# Altium PCB arm-debugger.PcbDoc
Units mm, origin at the board's own origin, x right, y up, seen from the top; angles counter-clockwise.
Board outline 50 x 30 mm, 4 copper layers (Top Layer, GND, 3V3, Bottom Layer), stack 0.603 mm thick; 58 components, 36 nets, 217 pads, 78 vias.
Unrouted connection lines stored in the file: 13.
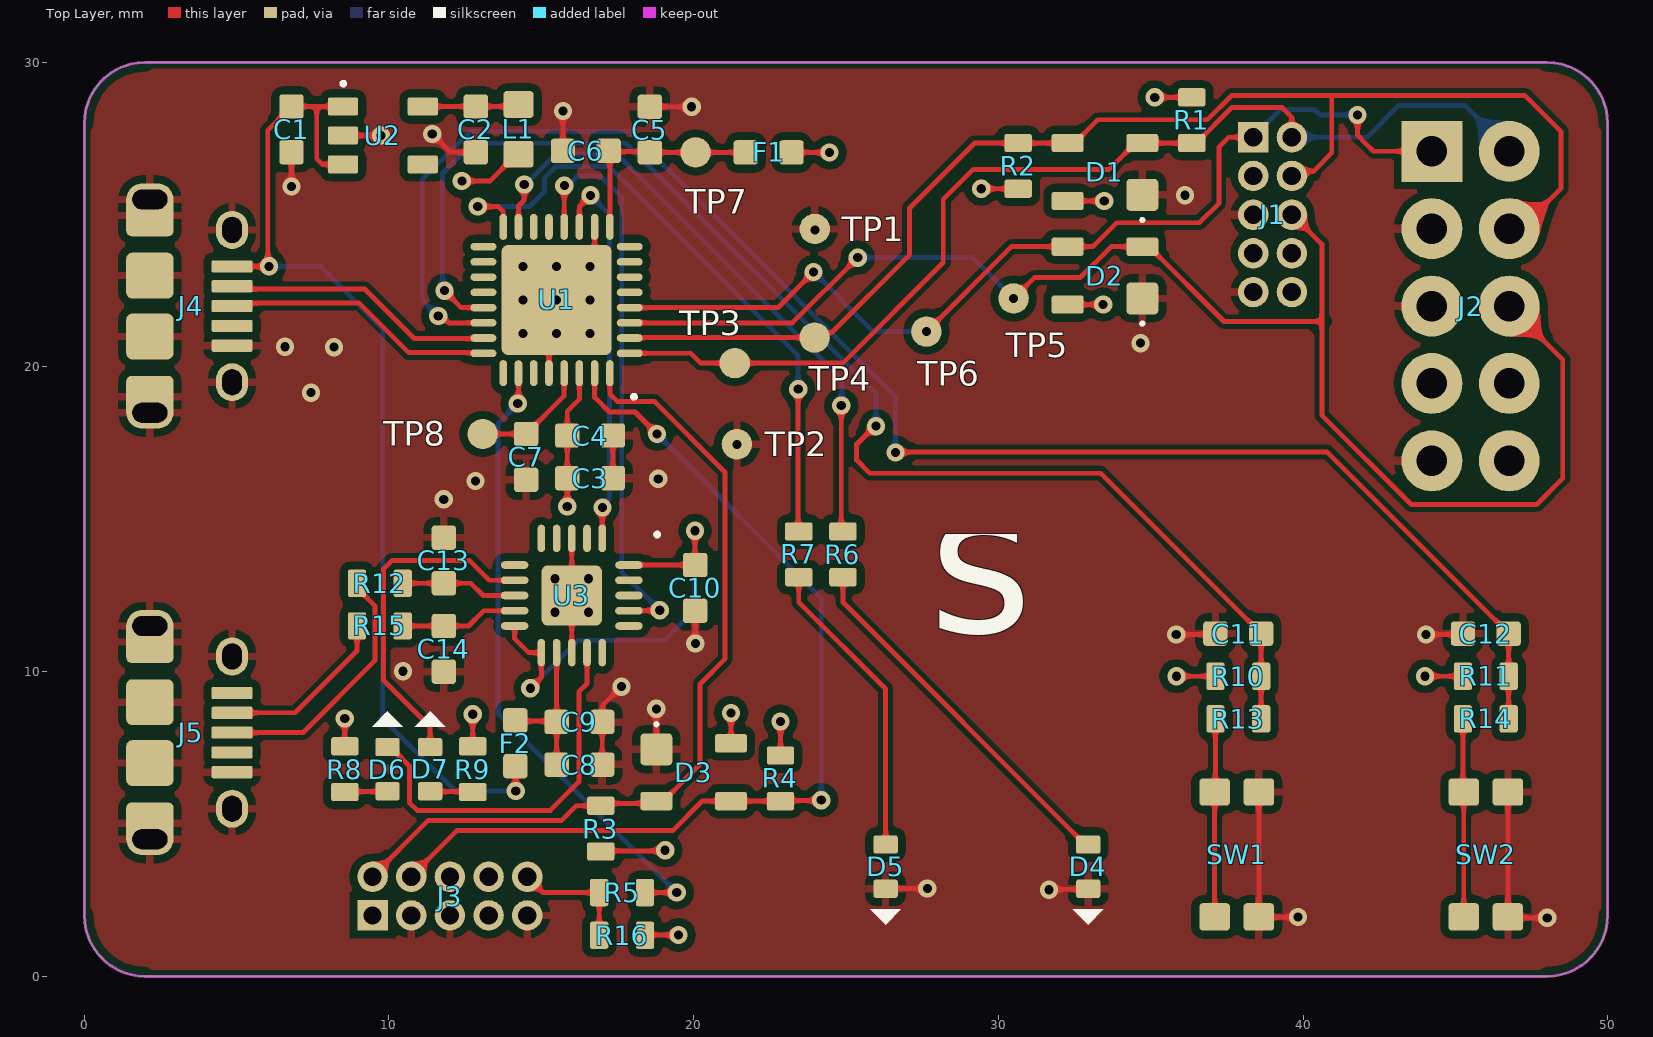
[diagram p0: Top Layer view]
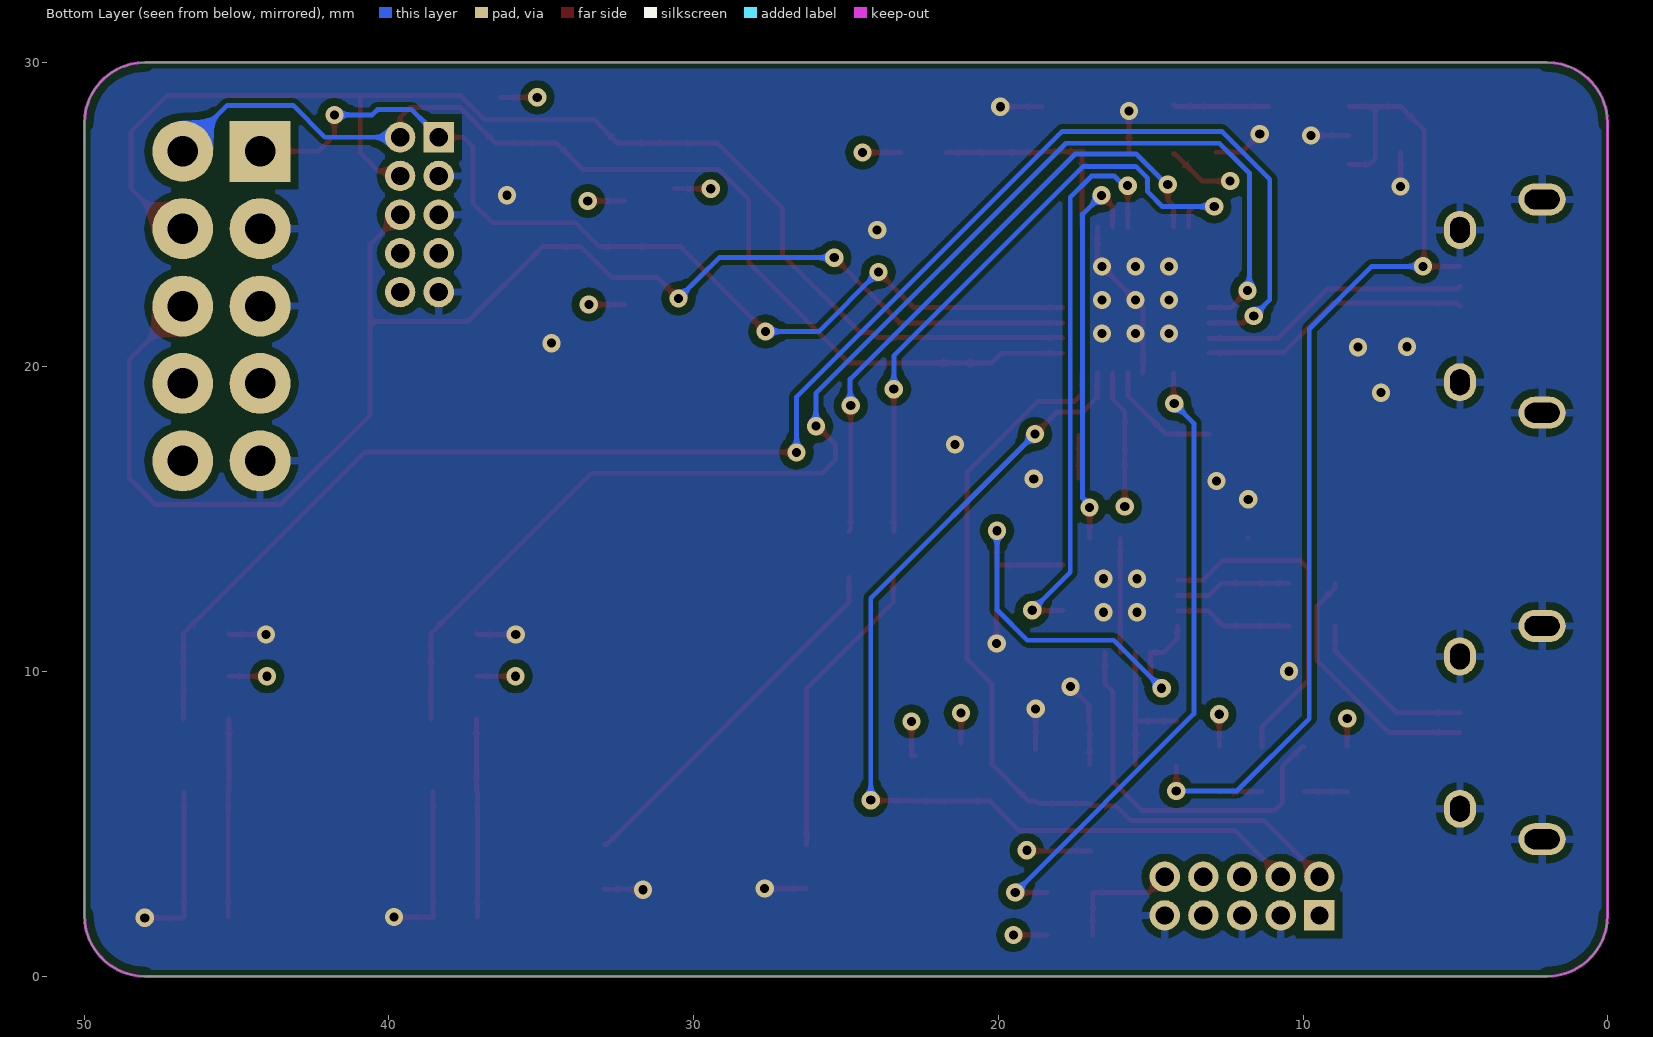
[diagram p1: Bottom Layer view, seen from below]
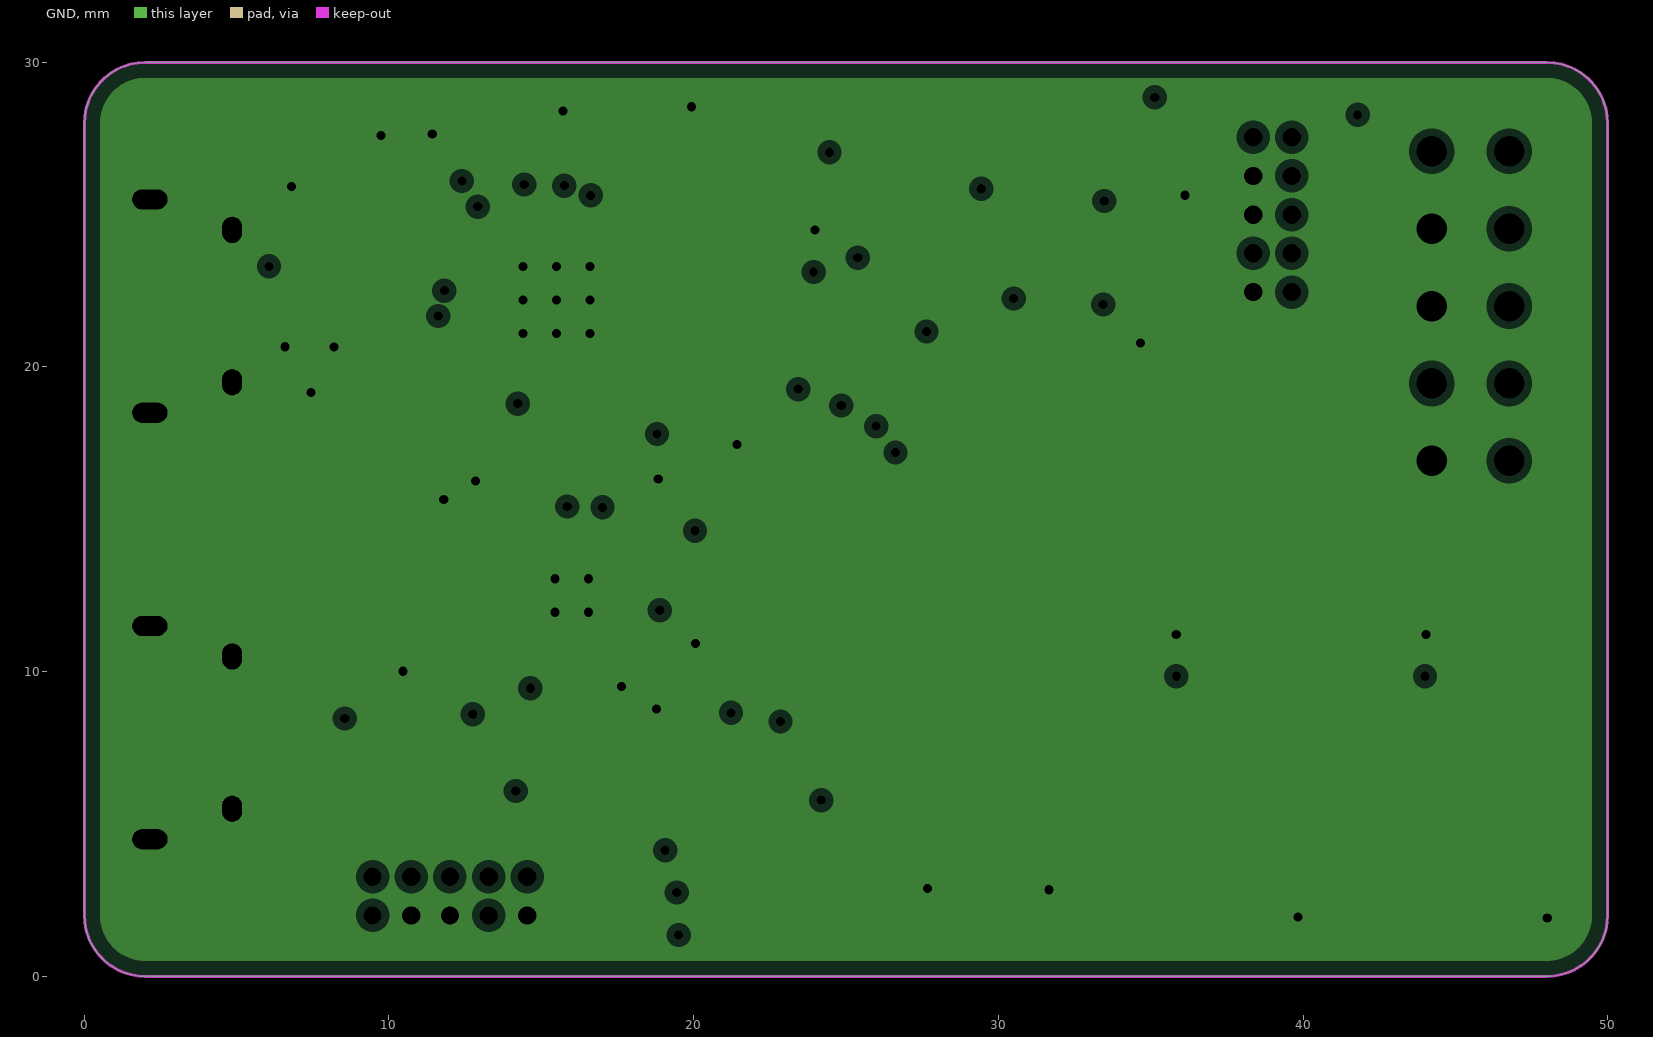
[diagram p2: GND, clearances drawn from the general rule]
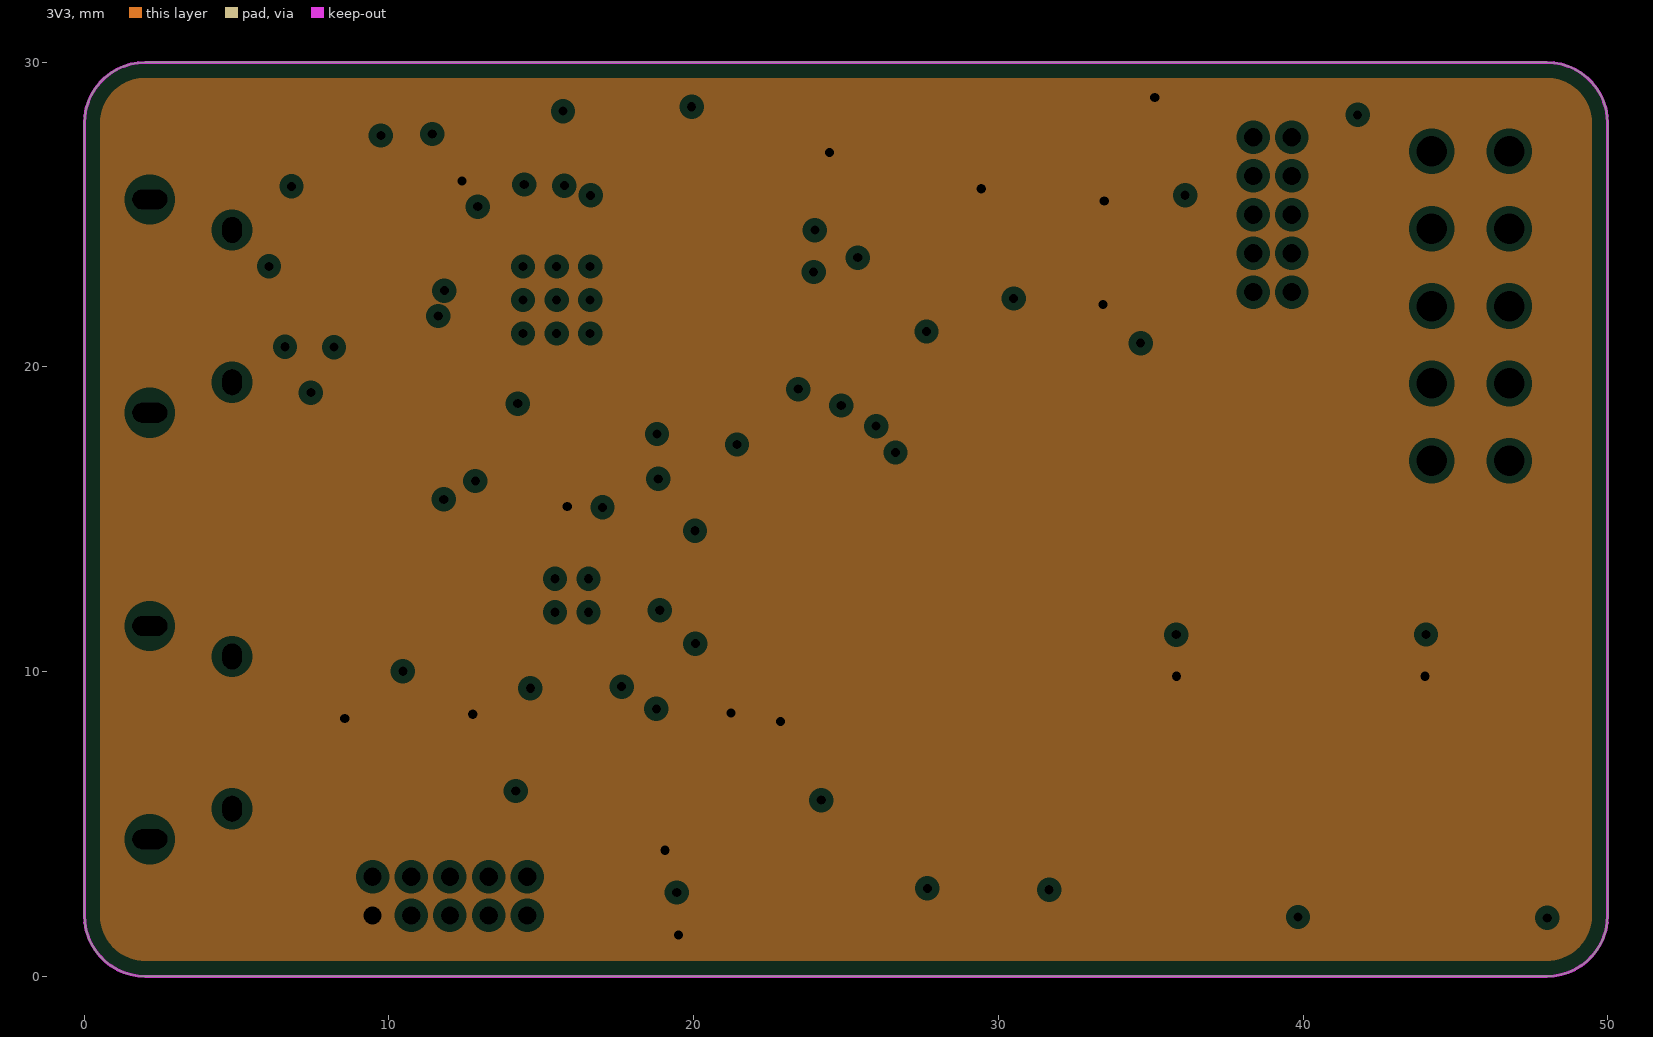
[diagram p3: 3V3, clearances drawn from the general rule]
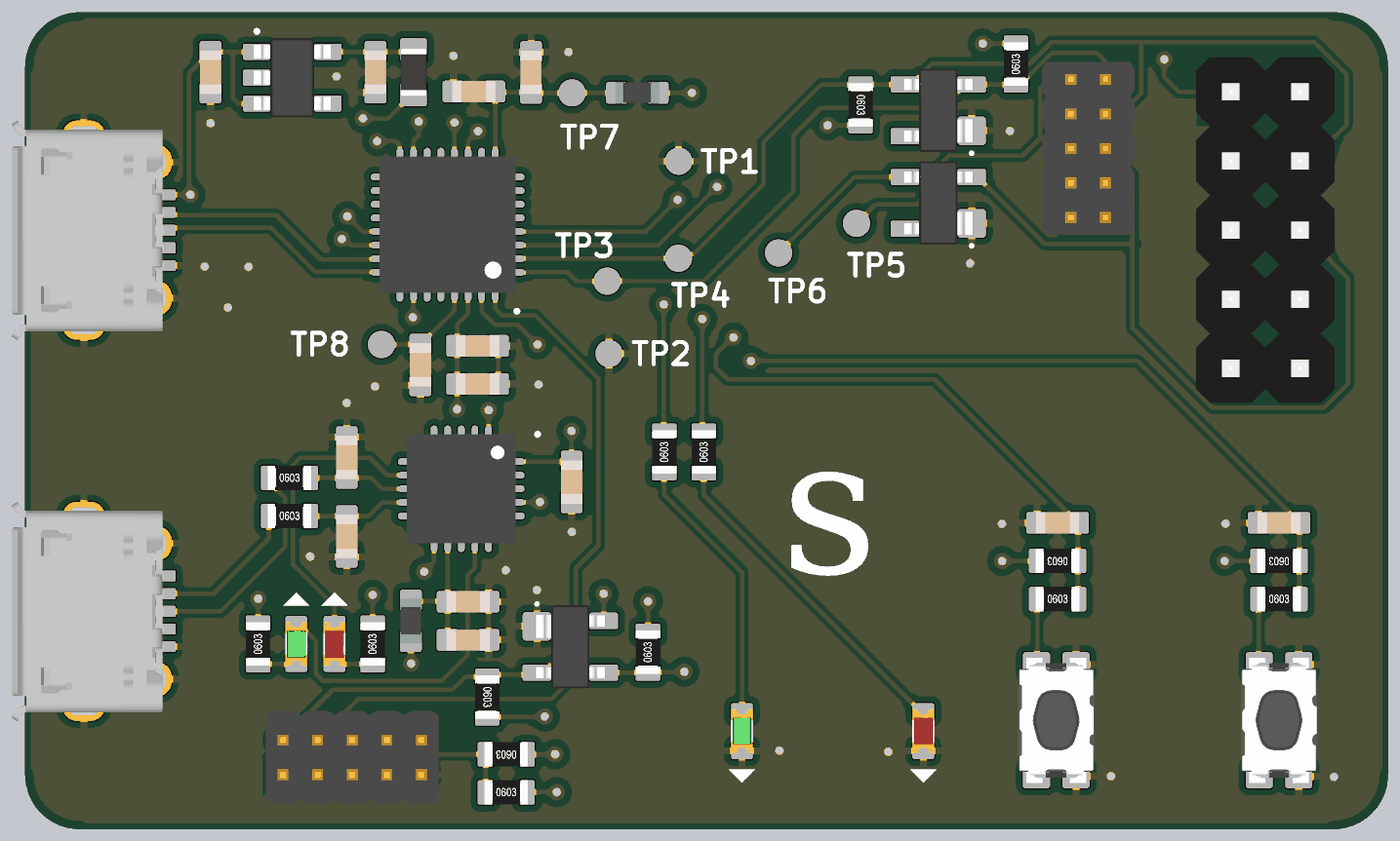
[diagram p4: 3D render of the assembled board from above, using the file's embedded part models]

## Layer stack, top to bottom
Top Solder: solder mask 0.0102, Solder Resist, Dk 3.5
Top Layer: signal copper 0.0356
Dielectric 2: prepreg 0.0711, PP-006, Dk 4.1
GND: plane copper 0.035, net GND
Dielectric 1: dielectric 0.32, FR-4, Dk 4.8
3V3: plane copper 0.035, net 3V3
Dielectric 3: prepreg 0.0711, PP-006, Dk 4.1
Bottom Layer: signal copper 0.0356
Bottom Solder: solder mask 0.0102, Solder Resist, Dk 3.5

## Board outline
0,2 0,28 cw(c2,28) 2,30 48,30 cw(c48,28) 50,28 50,2 cw(c48,2) 48,0 2,0 cw(c2,2)

## Design rules (kind name [scope] priority, off if disabled: settings)
Clearance [All] p1: gap=0.254 ignorepadtopadclearanceinfootprint=TRUE except(0: Arc-Hole Track-Hole SMDPad-Hole THPad-Hole Via-Hole Fill-Hole Poly-Hole Region-Hole Text-Hole; 0.127: Arc-Arc Arc-Track Track-Track SMDPad-SMDPad; 0.154: Track-Poly; 0.2: Arc-SMDPad Track-SMDPad; 0.33: Arc-THPad Track-THPad)
DiffPairsRouting [All] p1: maxlimit=0.5 minlimit=0.16 mostfreqgap=0.3 toplayer_minwidth=0.16 toplayer_maxwidth=5 toplayer_prefwidth=0.3 bottomlayer_minwidth=0.16 bottomlayer_maxwidth=5 bottomlayer_prefwidth=0.3 maxuncoupledlength=12.7
PlaneClearance [All] p1: clearance=0.25
PlaneConnect [All] p1: planeconnectstyle=Relief reliefexpansion=0.25 reliefentries=4 reliefconductorwidth=0.16 reliefairgap=0.2
PolygonConnect PolygonConnectVia [IsVia] p1: connectstyle=Direct reliefconductorwidth=0.254 reliefentries=4 polygonreliefangle="90 Angle" airgapwidth=0.254
PolygonConnect [All] p2: connectstyle=Relief reliefconductorwidth=0.254 reliefentries=4 polygonreliefangle="90 Angle" airgapwidth=0.254
RoutingVias [All] p1: holewidth=0.3 width=0.6 viastyle="Through Hole" minholewidth=0.2 minwidth=0.4 maxholewidth=6.3 maxwidth=10
SolderMaskExpansion [All] p1: expansion=0.05 istentingtop=FALSE
Width [All] p1: maxlimit=10 minlimit=0.127 preferedwidth=0.16
27 further rules are at their usual default settings.

## Classes and differential pairs
differential pair USB: +USB_P -USB_N
differential pair FTDI_USB: +FTDI_USB_P -FTDI_USB_N

## Components (designator, comment, footprint, x,y, rotation, side; value= is the part's Value field where it differs from the comment)
C1 "passive_5" "CAPACITOR 0603" 6.8,27.8 r90 top value=100nF
C2 "passive_5" "CAPACITOR 0603" 12.85,27.8 r90 top value=1uF
C3 "passive_5" "CAPACITOR 0603" 16.6,16.35 r180 top value=10uF
C4 "passive_5" "CAPACITOR 0603" 16.6,17.75 r180 top value=100nF
C5 "passive_5" "CAPACITOR 0603" 18.561,27.793 r270 top value=10uF
C6 "passive_5" "CAPACITOR 0603" 16.461,27.093 r0 top value=100nF
C7 "passive_5" "CAPACITOR 0603" 14.5,17.05 r90 top value=1uF
C8 "passive_5" "CAPACITOR 0603" 16.25,6.95 r180 top value=4.7uF
C9 "passive_5" "CAPACITOR 0603" 16.25,8.35 r180 top value=100nF
C10 "passive_5" "CAPACITOR 0603" 20.05,12.75 r90 top value=100nF
C11 "passive_5" "CAPACITOR 0603" 37.876,11.25 r0 top value=10nF
C12 "passive_5" "CAPACITOR 0603" 46,11.25 r0 top value=10nF
C13 "passive_5" "CAPACITOR 0603" 11.8,13.65 r270 top value=100nF
C14 "passive_5" "CAPACITOR 0603" 11.8,10.75 r90 top value=100nF
D1 "diode_3" CM1293A-02SR 33.5,26.4 r180 top
D2 "diode_3" CM1293A-02SR 33.5,23 r180 top
D3 "diode_3" CM1293A-02SR 20,6.7 r0 top
D4 "LED Red" "LED 0603 red" 32.95,3.6 r270 top
D5 "LED Green" "LED 0603 green" 26.3,3.6 r270 top
D6 "LED Green" "LED 0603 green" 9.95,6.8 r90 top
D7 "LED Red" "LED 0603 red" 11.35,6.8 r90 top
F1 "passive_8" "FERRIT BEAD 0603" 22.461,27.043 r180 top value="480Ω @ 100MHz"
F2 "passive_8" "FERRIT BEAD 0603" 14.15,7.65 r90 top value="480Ω @ 100MHz"
J1 "Header 1.27mm" "header male 2x5, pitch 1.27mm" 39,25 r0 top
J2 "Header 2.54mm" "header male 2x5, pitch 2.54mm" 45.5,22 r0 top
J3 "Header 1.27mm" "header male 2x5, pitch 1.27mm" 12,2.635 r90 top
J4 "USB micro B" "USB mico B female" 3.5,22 r270 top
J5 "USB micro B" "USB mico B female" 3.5,8 r270 top
L1 "passive_9" "INDUCTOR 0603" 14.25,27.8 r270 top value=10uH
R1 "passive_2" "RESISTOR 0603" 36.35,28.1 r90 top value=10kΩ
R2 "passive_2" "RESISTOR 0603" 30.65,26.6 r270 top value=10kΩ
R3 "passive_2" "RESISTOR 0603" 16.95,4.85 r270 top value=10kΩ
R4 "passive_2" "RESISTOR 0603" 22.85,6.5 r90 top value=10kΩ
R5 "passive_2" "RESISTOR 0603" 17.65,2.75 r180 top value=39Ω
R6 "passive_2" "RESISTOR 0603" 24.9,13.85 r90 top value=330Ω
R7 "passive_2" "RESISTOR 0603" 23.45,13.85 r90 top value=330Ω
R8 "passive_2" "RESISTOR 0603" 8.55,6.8 r90 top value=330Ω
R9 "passive_2" "RESISTOR 0603" 12.75,6.8 r90 top value=330Ω
R10 "passive_2" "RESISTOR 0603" 37.876,9.85 r180 top value=100kΩ
R11 "passive_2" "RESISTOR 0603" 46,9.85 r180 top value=100kΩ
R12 "passive_2" "RESISTOR 0603" 9.7,12.9 r0 top value=39Ω
R13 "passive_2" "RESISTOR 0603" 37.876,8.45 r0 top value=10kΩ
R14 "passive_2" "RESISTOR 0603" 46,8.45 r0 top value=10kΩ
R15 "passive_2" "RESISTOR 0603" 9.7,11.5 r0 top value=39Ω
R16 "passive_2" "resistor 0603" 17.65,1.35 r0 top value=10kΩ
SW1 "connector_35" "KMR621NG LFS" 37.826,4 r90 top
SW2 "connector_35" "KMR621NG LFS" 46,4 r90 top
TP1 "misc_2" "testpoint round, diameter 1mm" 23.978,24.532 r0 top
TP2 "misc_2" "testpoint round, diameter 1mm" 21.42,17.467 r0 top
TP3 "misc_2" "testpoint round, diameter 1mm" 21.351,20.127 r0 top
TP4 "misc_2" "testpoint round, diameter 1mm" 23.967,20.967 r0 top
TP5 "misc_2" "testpoint round, diameter 1mm" 30.5,22.25 r0 top
TP6 "misc_2" "testpoint round, diameter 1mm" 27.641,21.163 r0 top
TP7 "misc_2" "testpoint round, diameter 1mm" 20.061,27.043 r0 top
TP8 "misc_2" "testpoint round, diameter 1mm" 13.073,17.801 r0 top
U1 "SAMD21" ATSAMD21E17D-MUT 15.5,22.2 r180 top
U2 "regulator_1" TCR2EF33,LM(CT 9.8,27.6 r0 top
U3 "FTDI" FT231XQ-R 16,12.5 r270 top

## Footprints (in the part's own frame and the unit in brackets; to place one, negate y for a bottom-side part, rotate by r counter-clockwise, add the part's x,y. Pads: shape width x height; smd on the part's side, far side on the other; paste and mask are expansions set on the pad)
ATSAMD21E17D-MUT [mm] "QFN, 32-Leads, Body 5.00x5.00mm, Pitch 0.50mm, Thermal Pad 3.60x3.60mm, IPC Medium Density"
  oval 0.85x0.25 smd: 1(-2.4,1.75) 2(-2.4,1.25) 3(-2.4,0.75) 4(-2.4,0.25) 5(-2.4,-0.25) 6(-2.4,-0.75) 7(-2.4,-1.25) 8(-2.4,-1.75) 17(2.4,-1.75) 18(2.4,-1.25) 19(2.4,-0.75) 20(2.4,-0.25) 21(2.4,0.25) 22(2.4,0.75) 23(2.4,1.25) 24(2.4,1.75)
  oval 0.25x0.85 smd: 9(-1.75,-2.4) 10(-1.25,-2.4) 11(-0.75,-2.4) 12(-0.25,-2.4) 13(0.25,-2.4) 14(0.75,-2.4) 15(1.25,-2.4) 16(1.75,-2.4) 25(1.75,2.4) 26(1.25,2.4) 27(0.75,2.4) 28(0.25,2.4) 29(-0.25,2.4) 30(-0.75,2.4) 31(-1.25,2.4) 32(-1.75,2.4)
  rrect10% 3.6x3.6 smd: 33(0,0)
  silkscreen extent -2.59,3.13 -2.49,3.22, body extent -2.5,-2.5 2.5,2.5, height 1
"CAPACITOR 0603" [mm]
  rrect25% 0.8x0.8 smd: 1(-0.75,0) 2(0.75,0)
  body extent -0.8,-0.4 0.8,0.4, height 0.8
CM1293A-02SR [mm] "SOT143, 4-Leads, Body 2.93x2.64mm, Pitch 1.90mm, IPC Medium Density"
  rrect25% 1.05x1.05 smd: 1(-1.225,0.75)
  rrect25% 1.05x0.6 smd: 2(-1.225,-0.95) 3(1.225,-0.95) 4(1.225,0.95)
  silkscreen extent -1.27,1.53 -1.18,1.62, body extent -1.32,-1.52 1.32,1.52, height 1.12
"FERRIT BEAD 0603" [mm]
  rrect25% 0.8x0.8 smd: 1(-0.75,0) 2(0.75,0)
  body extent -0.79,-0.4 0.81,0.4, height 0.8
FT231XQ-R [mm] "QFN, 20-Leads, Body 4.00x4.00mm, Pitch 0.50mm, Thermal Pad 1.98x1.98mm, IPC Medium Density"
  oval 0.9x0.25 smd: 1(-1.875,1) 2(-1.875,0.5) 3(-1.875,0) 4(-1.875,-0.5) 5(-1.875,-1) 11(1.875,-1) 12(1.875,-0.5) 13(1.875,0) 14(1.875,0.5) 15(1.875,1)
  oval 0.25x0.9 smd: 6(-1,-1.875) 7(-0.5,-1.875) 8(0,-1.875) 9(0.5,-1.875) 10(1,-1.875) 16(1,1.875) 17(0.5,1.875) 18(0,1.875) 19(-0.5,1.875) 20(-1,1.875)
  rrect20% 1.98x1.98 smd: 21(0,0)
  silkscreen extent -2.05,2.75 -1.95,2.85, body extent -2,-2 2,2, height 0.8
"header male 2x5, pitch 1.27mm" [mm]
  rect 1x1 hole 0.6: 1(-0.635,2.54)
  round 1 hole 0.6: 2(0.635,2.54) 3(-0.635,1.27) 4(0.635,1.27) 5(-0.635,0) 6(0.635,0) 7(-0.635,-1.27) 8(0.635,-1.27) 9(-0.635,-2.54) 10(0.635,-2.54)
  body extent -1.7,-3.17 1.7,3.17, height 5.35
"header male 2x5, pitch 2.54mm" [mm]
  rect 2x2 hole 1: 1(-1.27,5.08)
  round 2 hole 1: 2(1.27,5.08) 3(-1.27,2.54) 4(1.27,2.54) 5(-1.27,0) 6(1.27,0) 7(-1.27,-2.54) 8(1.27,-2.54) 9(-1.27,-5.08) 10(1.27,-5.08)
  body extent -2.54,-6.35 2.54,6.35, height 8.89
"INDUCTOR 0603" [mm]
  rrect25% 0.88x0.99 smd: 1(-0.815,0) 2(0.815,0)
  body extent -0.87,-0.48 0.87,0.48, height 0.91
"KMR621NG LFS" [mm]
  rrect25% 0.9x1 smd: 1(-2.05,0.725) 1(2.05,0.725) 2(-2.05,-0.725) 2(2.05,-0.725)
  body extent -2.3,-1.4 2.3,1.4, height 1.9
"LED 0603 green" [mm]
  rrect25% 0.6x0.8 smd: 1(-0.725,0) 2(0.725,0)
  silkscreen extent 1.4,-0.5 1.9,0.5, body extent -0.8,-0.4 0.8,0.4, height 0.6
"LED 0603 red" [mm]
  rrect25% 0.6x0.8 smd: 1(-0.725,0) 2(0.725,0)
  silkscreen extent 1.4,-0.5 1.9,0.5, body extent -0.8,-0.4 0.8,0.4, height 0.6
"RESISTOR 0603" [mm]
  rrect25% 0.6x0.9 smd: 1(-0.75,0) 2(0.75,0)
  body extent -0.8,-0.45 0.8,0.45, height 0.5
"resistor 0603" [mm]
  rrect25% 0.6x0.9 smd: 1(-0.75,0) 2(0.75,0)
  body extent -0.8,-0.45 0.8,0.45, height 0.5
TCR2EF33,LM(CT [mm] "SOT23, 5-Leads, Body 2.90x2.80mm, Pitch 0.95mm, IPC Medium Density"
  rrect25% 1x0.6 smd: 1(-1.31,0.95) 2(-1.31,0) 3(-1.31,-0.95) 4(1.31,-0.95) 5(1.31,0.95)
  silkscreen extent -1.35,1.65 -1.25,1.75, body extent -1.41,-1.46 1.41,1.46, height 1.12
"testpoint round, diameter 1mm" [mm]
  round 1 smd: 1(0,0)
"USB mico B female" [mm]
  rrect25% 0.4x1.35 smd: 1(-1.3,1.35) 2(-0.65,1.35) 3(0,1.35) 4(0.65,1.35) 5(1.3,1.35)
  rrect100% 1.05x1.55 hole 0.65 slot 1.15 at 90 deg: 6(-3.5,-1.35) 6(3.5,-1.35)
  rrect25% 1.37x1.55 smd: 6(-2.975,-1.35) 6(2.975,-1.35)
  rrect100% 1.25x1.05 hole 0.65 slot 0.85 at 0 deg: 6(-2.5,1.35) 6(2.5,1.35)
  rrect25% 1.5x1.55 smd: 6(-1,-1.35) 6(1,-1.35)
  body extent -4.01,-3.99 4.03,1.59, height 2.76

## Part data
C1 C2 C3 C4 C5 C6 C7 C8 C9 C10 C11 C12 C13 C14: "Capacitor 0603"
D1 D2 D3: "TVS, 2 channels, standoff 3.3V,  diode array with avalanche diode", Clamping voltage=9.9V, Manufacturer 1="ON Semiconductor", Manufacturer Part Number 1=CM1293A-02SR, Peak current=1A, Supplier Part Number 1=CM1293A-02SROSCT-ND, Link=https://www.digikey.no/product-detail/en/on-semiconductor/CM1293A-02SR/CM1293A-02SROSCT-ND/3487527, Reverse standoff=3.3V, Supplier 1=Digi-Key
D4 D7: library part diode_0, "LED 0603 red"
D5 D6: library part diode_1, "LED 0603 green"
F1 F2: "Ferrite bead 0603"
J1 J3: library part connector_17, "Header male 2x5, pitch 1.27mm"
J2: library part connector_30, "Header male 2x5, pitch 2.54mm"
J4 J5: library part connector_34, Manufacturer 1="Amphenol ICC (FCI)", Manufacturer Part Number 1=10118194-0001LF, Supplier Part Number 1=609-4618-1-ND, Link=https://www.digikey.no/product-detail/en/amphenol-icc-fci/10118194-0001LF/609-4618-1-ND/2785382, Supplier 1=Digi-Key
L1: "Inductor 0603"
R1 R2 R3 R4 R5 R6 R7 R8 R9 R10 R11 R12 R13 R14 R15 R16: "Resistor 0603"
SW1 SW2: "Tactile switch SMD, tiny", Manufacturer 1=C&K, Manufacturer Part Number 1="KMR621NG LFS", Supplier Part Number 1=CKN10684CT-ND, Link=https://www.digikey.no/product-detail/en/c-k/KMR621NG-LFS/CKN10684CT-ND/6035356, Supplier 1=Digi-Key
TP1 TP2 TP3 TP4 TP5 TP6 TP7 TP8: "Test-point round, diameter 1.0mm"
U1: library part cpu_0, "SAMD21, 48 MHz, 128KB flash, 16KB RAM, 32 pins, USB device", Manufacturer 1="Microchip Technology", Manufacturer Part Number 1=ATSAMD21E17D-MUT, Supplier Part Number 1=ATSAMD21E17D-MUTTR-ND, Link=https://www.digikey.no/products/no?keywords=ATSAMD21E17D-MUTTR-ND, Supplier 1=Digi-Key
U2: "LDO fixed, 3.3V output, 0.2V dropout, 200mA", Current (max)=200mA, Manufacturer 1="Toshiba Semiconductor and Storage", Manufacturer Part Number 1=TCR2EF33,LM(CT, Output voltage=3.3V, Supplier Part Number 1=TCR2EF33LM(CTCT-ND, Dropout (max)=0.2V, Link=https://www.digikey.no/product-detail/en/toshiba-semiconductor-and-storage/TCR2EF33-LM-CT/TCR2EF33LM-CTCT-ND/4503328, Supplier 1=Digi-Key
U3: library part ic_1, "USB to UART converter, FTDI, single", Manufacturer 1="FTDI, Future Technology Devices International Ltd", Manufacturer Part Number 1=FT231XQ-R, Supplier Part Number 1=768-1128-1-ND, Supplier 1=Digi-Key

## Via types
v1: diameter 0.6, hole 0.3, Top Layer to Bottom Layer, tented both sides, 78 vias

## Nets (pads, with @x,y where several pads share a name; then routed paths per layer and width w, separated by ;. In a path a pad name is that pad's centre, name@x,y a point inside that pad or via, vN(x,y) a via of type N, cw(c..) or ccw(c..) an arc to the next point about the centre after c; other vN are vias at no path point)
3V3: C3.2 C4.2 D1.4 D2.4 D3.4 F1.1 J3.1 L1.2 R1.2 R2.2 R3.2 R4.2 R8.2 R9.2 R10.2 R11.2 R16.2 U1.30 | length 22.8
  Top Layer w0.16: R8.2 v1(8.55,8.464) ; v1(12.391,26.103) 13.313,26.103 14.195,26.985 L1.2 ; R9.2 v1(12.75,8.603) ; v1(15.85,15.421) C3.2 C4.2 15.85,18.547 16.25,18.947 U1.30 ; R3.2 16.969,4.119 19.045,4.119 v1(19.064,4.138) ; R16.2 18.409,1.359 v1(19.504,1.359) ; D3.4 v1(21.225,8.646) ; R4.2@22.7,7.25 R4.2 v1(22.85,8.365) ; F1.1 v1(24.46,27.043) ; v1(29.44,25.85) R2.2 ; D2.4 v1(33.44,22.05) ; D1.4 v1(33.475,25.45) ; v1(35.135,28.85) R1.2 ; v1(35.846,9.85) R10.2 ; v1(44.004,9.85) R11.2
5V: C1.2 F2.1 J4.1 U2.1 U2.3 | length 34.6
  Top Layer w0.16: J4.1 5.927,23.3 5.93,23.303 v1(6.063,23.303) ; v1@6.021,23.394 6.021,27.771 C1.2 7.627,28.55 ; U2.3 7.815,26.65 7.627,26.839 7.627,28.55 ; U2.1 7.627,28.55 ; F2.1 14.159,6.891 v1(14.159,6.083)
  Bottom Layer w0.16: v1(6.063,23.303) 7.739,23.303 9.794,21.249 9.794,8.458 12.169,6.083 v1(14.159,6.083)
EXT_RESET: D2.2 J1.6 J2.6 TP5.1 U1.3 | length 48.7
  Top Layer w0.16: U1.3 23.242,21.45 25.381,23.59 v1(25.387,23.59) ; v1(30.5,22.25) 31.19,22.94 32.698,22.94 33.708,23.95 D2.2 34.95,23.95 37.406,21.494 40.621,21.494 ; J1.6 39.652,25 40.621,24.031 40.621,21.494 ; J2.6 48.527,20.243 48.527,16.346 47.668,15.487 43.553,15.487 40.621,18.419 40.621,21.494
  Bottom Layer w0.16: v1(25.387,23.59) 29.16,23.59 29.763,22.987 v1(30.5,22.25)
EXT_SWCLK: D1.3 J1.4 J2.4 R2.1 TP4.1 U1.2 | length 42.9
  Top Layer w0.16: U1.2 17.917,20.967 TP4.1 24.128,21.128 24.523,21.128 27.086,23.69 27.086,25.218 29.218,27.35 R2.1 D1.3 32.5,27.35 33.263,28.113 36.858,28.113 37.653,28.908 40.942,28.908 ; J1.4 39.796,26.431 40.346,26.431 40.942,27.027 40.942,28.908 ; J2.4 47.147,24.54 48.473,25.866 48.473,27.725 47.29,28.908 41.01,28.908 40.942,28.908
EXT_SWDIO: D1.2 J1.2 J2.2 R1.1 TP3.1 U1.1 | length 35.6
  Top Layer w0.16: U1.1 19.907,20.45 20.23,20.127 24.891,20.127 28.194,23.43 28.194,25.5 29.178,26.484 33.634,26.484 34.5,27.35 D1.2 R1.1 36.5,27.35 37.666,28.516 39.313,28.516 39.635,28.195 J1.2
  Bottom Layer w0.16: J1.2 42.102,27.54 43.149,28.587 45.303,28.587 46.77,27.12 J2.2
EXT_VREF: D2.3 J1.1 J2.1 TP6.1 U1.4 | length 32.7
  Top Layer w0.16: U1.4 22.767,21.95 v1(23.937,23.12) ; v1(27.641,21.163) 30.427,23.95 D2.3 33.1,23.95 33.885,24.735 36.6,24.735 37.245,25.38 37.245,27.225 37.56,27.54 J1.1 ; v1(41.792,28.274) 41.792,27.601 42.059,27.334 42.313,27.08 J2.1
  Bottom Layer w0.16: v1(23.937,23.12) 25.893,21.163 v1(27.641,21.163) ; J1.1 38.785,27.96 38.785,27.977 39.258,28.45 40.378,28.45 40.553,28.274 v1(41.792,28.274)
FTDI_USB_N: C14.2 R15.2 U3.9 | length 3.9
  Top Layer w0.16: R15.2 C14.2 12.608,11.5 13.108,12 U3.9
FTDI_USB_P: C13.2 R12.2 U3.8 | length 3.8
  Top Layer w0.16: R12.2 C13.2 12.689,12.9 13.089,12.5 U3.8
GND: C1.1 C2.1 C3.1 C4.1 C5.1 C6.1 C7.1 C8.1 C9.1 C10.1 C11.1 C12.1 C13.1 C14.1 D1.1 D2.1 D3.1 D4.2 D5.2 J1.3 J1.5 J1.9 J2.3 J2.5 J2.9 J3.3 J3.5 J3.9 J4.5 J4.6 J5.5 J5.6 SW1.2 SW2.2 TP1.1 TP2.1 U1.10 U1.28 U1.33 U2.2 U3.3 U3.13 U3.21 | length 38.6
  Top Layer w0.16: v1(6.8,25.927) C1.1 ; U2.2 v1(9.735,27.6) ; v1(11.422,27.645) 12.017,27.05 C2.1 ; C13.1 C13.1@11.812,14.413 ; U1.28 15.25,21.95 v1(15.5,22.2) v1(16.6,23.3) 16.75,23.45 U1.10 ; C6.1 v1(15.711,28.4) ; U3.13 U3.21 U3.3 ; C8.1 C9.1 17.021,8.371 17.021,8.896 v1(17.634,9.509) ; C3.1 C4.1 ; C5.1 v1(19.933,28.543) ; D3.1 v1(18.775,8.78) ; C10.1 20.055,11.995 v1(20.055,10.921) ; TP2.1 21.424,17.464 v1(21.424,17.455) ; v1(23.978,24.494) TP1.1 ; D5.2 26.305,2.88 27.665,2.88 v1(27.67,2.885) ; v1(31.666,2.844) 31.682,2.859 32.934,2.859 D4.2 ; v1(35.839,11.216) 37.092,11.216 C11.1 ; SW1.2@38.551,6.05 38.551,1.95 38.555,1.945 v1(39.837,1.945) ; v1(44.036,11.22) 45.22,11.22 C12.1 ; SW2.2@46.725,6.05 46.725,1.95 46.755,1.92 v1(48.018,1.92)
  other v1: 10.457,10.014 15.45,11.95 16.55,11.95 15.45,13.05 16.55,13.05 11.796,15.655 12.836,16.259 18.836,16.329 7.437,19.157 6.589,20.666 8.195,20.651 34.669,20.782 14.4,21.1 15.5,21.1 16.6,21.1 14.4,22.2 16.6,22.2 14.4,23.3 15.5,23.3 36.129,25.639
LED_GREEN: R7.2 U1.16 | length 21.1
  Top Layer w0.16: v1(12.914,25.265) 13.589,25.266 13.75,25.105 U1.16 ; v1(23.431,19.274) 23.431,14.619 R7.2
  Bottom Layer w0.16: v1(12.914,25.265) 12.916,25.267 14.614,25.267 15.098,25.751 15.098,26.194 15.489,26.585 17.216,26.585 23.431,20.371 v1(23.431,19.274)
LED_RED: R6.2 U1.15 | length 20.4
  Top Layer w0.16: U1.15 14.25,25.291 14.441,25.483 v1(14.441,25.991) ; v1(24.843,18.736) 24.843,14.657 R6.2
  Bottom Layer w0.16: v1(14.441,25.991) 14.479,25.991 15.477,26.99 17.479,26.99 24.866,19.603 24.866,18.758 v1(24.843,18.736)
NetC2_2: C2.2 L1.1 U2.5 | length 3.2
  Top Layer w0.16: U2.5 C2.2 14.185,28.55 L1.1
NetC5_2: C5.2 C6.2 F1.2 TP7.1 U1.9 | length 7
  Top Layer w0.16: C6.2 C6.2@17.236,27.068 ; U1.9 17.25,27.054 C6.2@17.236,27.068 ; F1.2 TP7.1 C5.2 18.536,27.068 C6.2@17.236,27.068
NetC7_2: C7.2 TP8.1 U1.29 | length 3.9
  Top Layer w0.16: TP8.1 14.499,17.801 C7.2 15.75,19.05 U1.29
NetC8_2: C8.2 C9.2 F2.2 U3.12 | length 5
  Top Layer w0.16: F2.2 14.175,8.375 15.475,8.375 C9.2 ; C8.2 C9.2 ; U3.12 C9.2
NetC10_2: C10.2 U3.10 U3.11 U3.20 | length 15.2
  Top Layer w0.16: U3.10 14.125,11.086 14.586,10.625 U3.11 15,9.815 v1(14.641,9.455) ; U3.20 19.993,13.5 C10.2 20.043,13.507 v1(20.043,14.626)
  Bottom Layer w0.16: v1(14.641,9.455) 16.216,11.031 19.044,11.031 20.043,12.029 v1(20.043,14.626)
NetD4_1: D4.1 R6.1 | length 12.2
  Top Layer w0.16: R6.1 24.9,12.275 32.85,4.325 D4.1
NetD5_1: D5.1 R7.1 | length 10
  Top Layer w0.16: R7.1 23.45,12.281 26.3,9.431 D5.1
NetD6_1: D6.1 R8.1 | length 1.4
  Top Layer w0.16: R8.1 8.563,6.062 9.938,6.062 D6.1
NetD6_2: D6.2 U3.14 | length 12.6
  Top Layer w0.16: D6.2 10.05,7.525 10.67,6.905 10.67,5.703 10.928,5.445 15.295,5.445 16.234,6.384 16.234,9.339 16.5,9.605 U3.14
NetD7_1: D7.1 R9.1 | length 1.4
  Top Layer w0.16: D7.1 11.362,6.062 12.737,6.062 R9.1
NetD7_2: D7.2 U3.7 | length 11.2
  Top Layer w0.16: D7.2 11.35,8.184 9.823,9.711 9.823,13.375 10.093,13.645 12.645,13.645 13.29,13 U3.7
NetJ5_2: J5.2 R15.1 | length 5.8
  Top Layer w0.16: J5.2 6.916,8.65 8.95,10.684 R15.1
NetJ5_3: J5.3 R12.1 | length 8.4
  Top Layer w0.16: J5.3 7.176,8 9.536,10.36 9.536,12.164 8.95,12.75 R12.1
NetR5_1: R5.1 U1.26 | length 20.8
  Top Layer w0.16: v1(14.225,18.798) 14.25,18.824 U1.26 ; R5.1 v1(19.445,2.75)
  Bottom Layer w0.16: v1(14.225,18.798) 13.582,18.155 13.582,8.614 v1(19.445,2.75)
NetR13_1: R13.1 SW1.1 | length 6.5
  Top Layer w0.16: SW1.1@37.101,1.95 37.101,6.05 37.126,6.075 R13.1
NetR14_1: R14.1 SW2.1 | length 6.5
  Top Layer w0.16: R14.1 45.25,6.075 45.275,6.05 SW2.1@45.275,1.95
RESET: J3.10 R5.2 R16.1 | length 4
  Top Layer w0.16: J3.10 15.06,2.75 R5.2 R16.1
SWCLK: D3.3 J3.4 R4.1 U1.31 | length 32.1
  Top Layer w0.16: J3.4 10.73,3.287 12.226,4.783 19.308,4.783 20.274,5.75 D3.3 R4.1 22.867,5.767 24.169,5.767 v1(24.186,5.784) ; U1.31 16.75,19.001 17.227,18.524 18.074,18.524 v1(18.797,17.801)
  Bottom Layer w0.16: v1(18.797,17.801) 24.186,12.412 v1(24.186,5.784)
SWDIO: D3.2 J3.2 R3.1 U1.32 | length 27.7
  Top Layer w0.16: J3.2 9.46,3.287 11.292,5.119 15.664,5.119 16.145,5.6 R3.1 17.025,5.675 18.7,5.675 D3.2 19,5.75 20.207,6.957 20.207,9.594 21.034,10.42 21.034,16.539 18.7,18.872 17.491,18.872 17.25,19.113 U1.32
SWITCH_A: C11.2 R10.1 R13.2 U1.21 | length 44.4
  Top Layer w0.16: v1(11.819,22.505) 12.374,21.95 U1.21 ; v1(25.988,18.058) 25.945,18.058 25.344,17.458 25.344,16.951 25.781,16.514 33.361,16.514 C11.2 R13.2
  Bottom Layer w0.16: v1(11.819,22.505) 11.757,22.567 11.757,26.366 12.362,26.97 12.372,26.97 12.747,27.346 17.78,27.346 25.988,19.138 v1(25.988,18.058)
SWITCH_B: C12.2 R11.1 R14.2 U1.22 | length 53.3
  Top Layer w0.16: v1(11.616,21.676) 11.735,21.676 11.961,21.45 U1.22 ; v1@26.625,17.204 40.796,17.204 C12.2 R11.1 R14.2
  Bottom Layer w0.16: v1(11.616,21.676) 11.09,22.201 11.09,26.161 12.653,27.724 17.919,27.724 26.622,19.021 26.622,17.198 v1(26.625,17.194)
UART_RX: U1.12 U3.17 | length 18.7
  Top Layer w0.16: U1.12 15.753,24.603 15.753,25.949 v1(15.755,25.951) ; U3.17 17.882,12.007 18.881,12.007 v1(18.889,12.014)
  Bottom Layer w0.16: v1(15.755,25.951) 15.874,25.951 16.191,26.268 16.939,26.268 17.64,25.566 17.64,13.263 v1(18.889,12.014)
UART_TX: U1.11 U3.1 | length 12.8
  Top Layer w0.16: U1.11 16.25,25.276 16.608,25.634 v1(16.616,25.634) ; U3.1 17.003,14.378 17.003,15.388 v1(17.006,15.391)
  Bottom Layer w0.16: v1(16.616,25.634) 17.234,25.016 17.234,15.705 17.006,15.477 v1(17.006,15.391)
USB_N: J4.2 U1.23 | length 9
  Top Layer w0.16: J4.2 4.945,22.555 9.213,22.555 10.838,20.93 12.716,20.93 12.719,20.933 13.083,20.933 U1.23
USB_P: J4.3 U1.24 | length 9
  Top Layer w0.16: J4.3 4.945,22.095 9.023,22.095 10.648,20.47 12.716,20.47 12.719,20.467 13.083,20.467 U1.24
pads on no net: J1.7 J1.8 J1.10 J2.7 J2.8 J2.10 J3.6 J3.7 J3.8 J4.4 J5.1 J5.4 U1.5 U1.6 U1.7 U1.8 U1.13 U1.14 U1.17 U1.18 U1.19 U1.20 U1.25 U1.27 U2.4 U3.2 U3.4 U3.5 U3.6 U3.15 U3.16 U3.18 U3.19

## Polygon pours and split planes (outlines as drawn)
GND on Bottom Layer "GND_L04_P000" (solid, remove dead copper, pour order 0): 0,2 0,28 cw(c2,28) 2,30 48,30 cw(c48,28) 50,28 50,2 cw(c48,2) 48,0 2,0 cw(c2,2)
GND on Top Layer "GND_L01_P001" (solid, remove dead copper, pour order 1): 0,2 0,28 cw(c2,28) 2,30 48,30 cw(c48,28) 50,28 50,2 cw(c48,2) 48,0 2,0 cw(c2,2)
3V3 on 3V3 (split plane): 48.167,29.482 48.332,29.454 48.493,29.408 48.647,29.344 48.794,29.263 48.93,29.166 49.055,29.055 49.166,28.93 49.263,28.794 49.344,28.647 49.408,28.493 49.454,28.332 49.482,28.167 49.491,28.015 49.49,28 49.49,2 49.491,1.985 49.482,1.833 49.454,1.668 49.408,1.507 49.344,1.353 49.263,1.206 49.166,1.07 49.055,0.945 48.93,0.834 48.794,0.737 48.647,0.656 48.493,0.592 48.332,0.546 48.167,0.518 48.015,0.509 48,0.51 2,0.51 1.985,0.509 1.833,0.518 1.668,0.546 1.507,0.592 1.353,0.656 1.206,0.737 1.07,0.834 0.945,0.945 0.834,1.07 0.737,1.206 0.656,1.353 0.592,1.507 0.546,1.668 0.518,1.833 0.509,1.985 0.51,2 0.51,28 0.509,28.015 0.518,28.167 0.546,28.332 0.592,28.493 0.656,28.647 0.737,28.794 0.834,28.93 0.945,29.055 1.07,29.166 1.206,29.263 1.353,29.344 1.507,29.408 1.668,29.454 1.833,29.482 1.985,29.491 2,29.49 48,29.49 48.015,29.491
GND on GND (split plane): 48.167,29.482 48.332,29.454 48.493,29.408 48.647,29.344 48.794,29.263 48.93,29.166 49.055,29.055 49.166,28.93 49.263,28.794 49.344,28.647 49.408,28.493 49.454,28.332 49.482,28.167 49.491,28.015 49.49,28 49.49,2 49.491,1.985 49.482,1.833 49.454,1.668 49.408,1.507 49.344,1.353 49.263,1.206 49.166,1.07 49.055,0.945 48.93,0.834 48.794,0.737 48.647,0.656 48.493,0.592 48.332,0.546 48.167,0.518 48.015,0.509 48,0.51 2,0.51 1.985,0.509 1.833,0.518 1.668,0.546 1.507,0.592 1.353,0.656 1.206,0.737 1.07,0.834 0.945,0.945 0.834,1.07 0.737,1.206 0.656,1.353 0.592,1.507 0.546,1.668 0.518,1.833 0.509,1.985 0.51,2 0.51,28 0.509,28.015 0.518,28.167 0.546,28.332 0.592,28.493 0.656,28.647 0.737,28.794 0.834,28.93 0.945,29.055 1.07,29.166 1.206,29.263 1.353,29.344 1.507,29.408 1.668,29.454 1.833,29.482 1.985,29.491 2,29.49 48,29.49 48.015,29.491

## Keep-outs
Keep-Out Layer:
  lines w0.1: 0,2 ccw(c2,2) 2,0 48,0 ccw(c48,2) 50,2 50,28 ccw(c48,28) 48,30 2,30 ccw(c2,28) 0,28 0,25 0,2

## Silkscreen, mask and mechanical layers (free items; w line width, h text height)
Top Overlay:
  text "s" at 27.712,9.402 h10

## Dimensions
0,30 to 4,22 on Board dimentions
0,0 to 3,8 on Board dimentions
0,0 to 50,0 on Board dimentions
50,0 to 50,30 on Board dimentions